# EAGLE board OpenBook_Board (EAGLE 9.7.0)
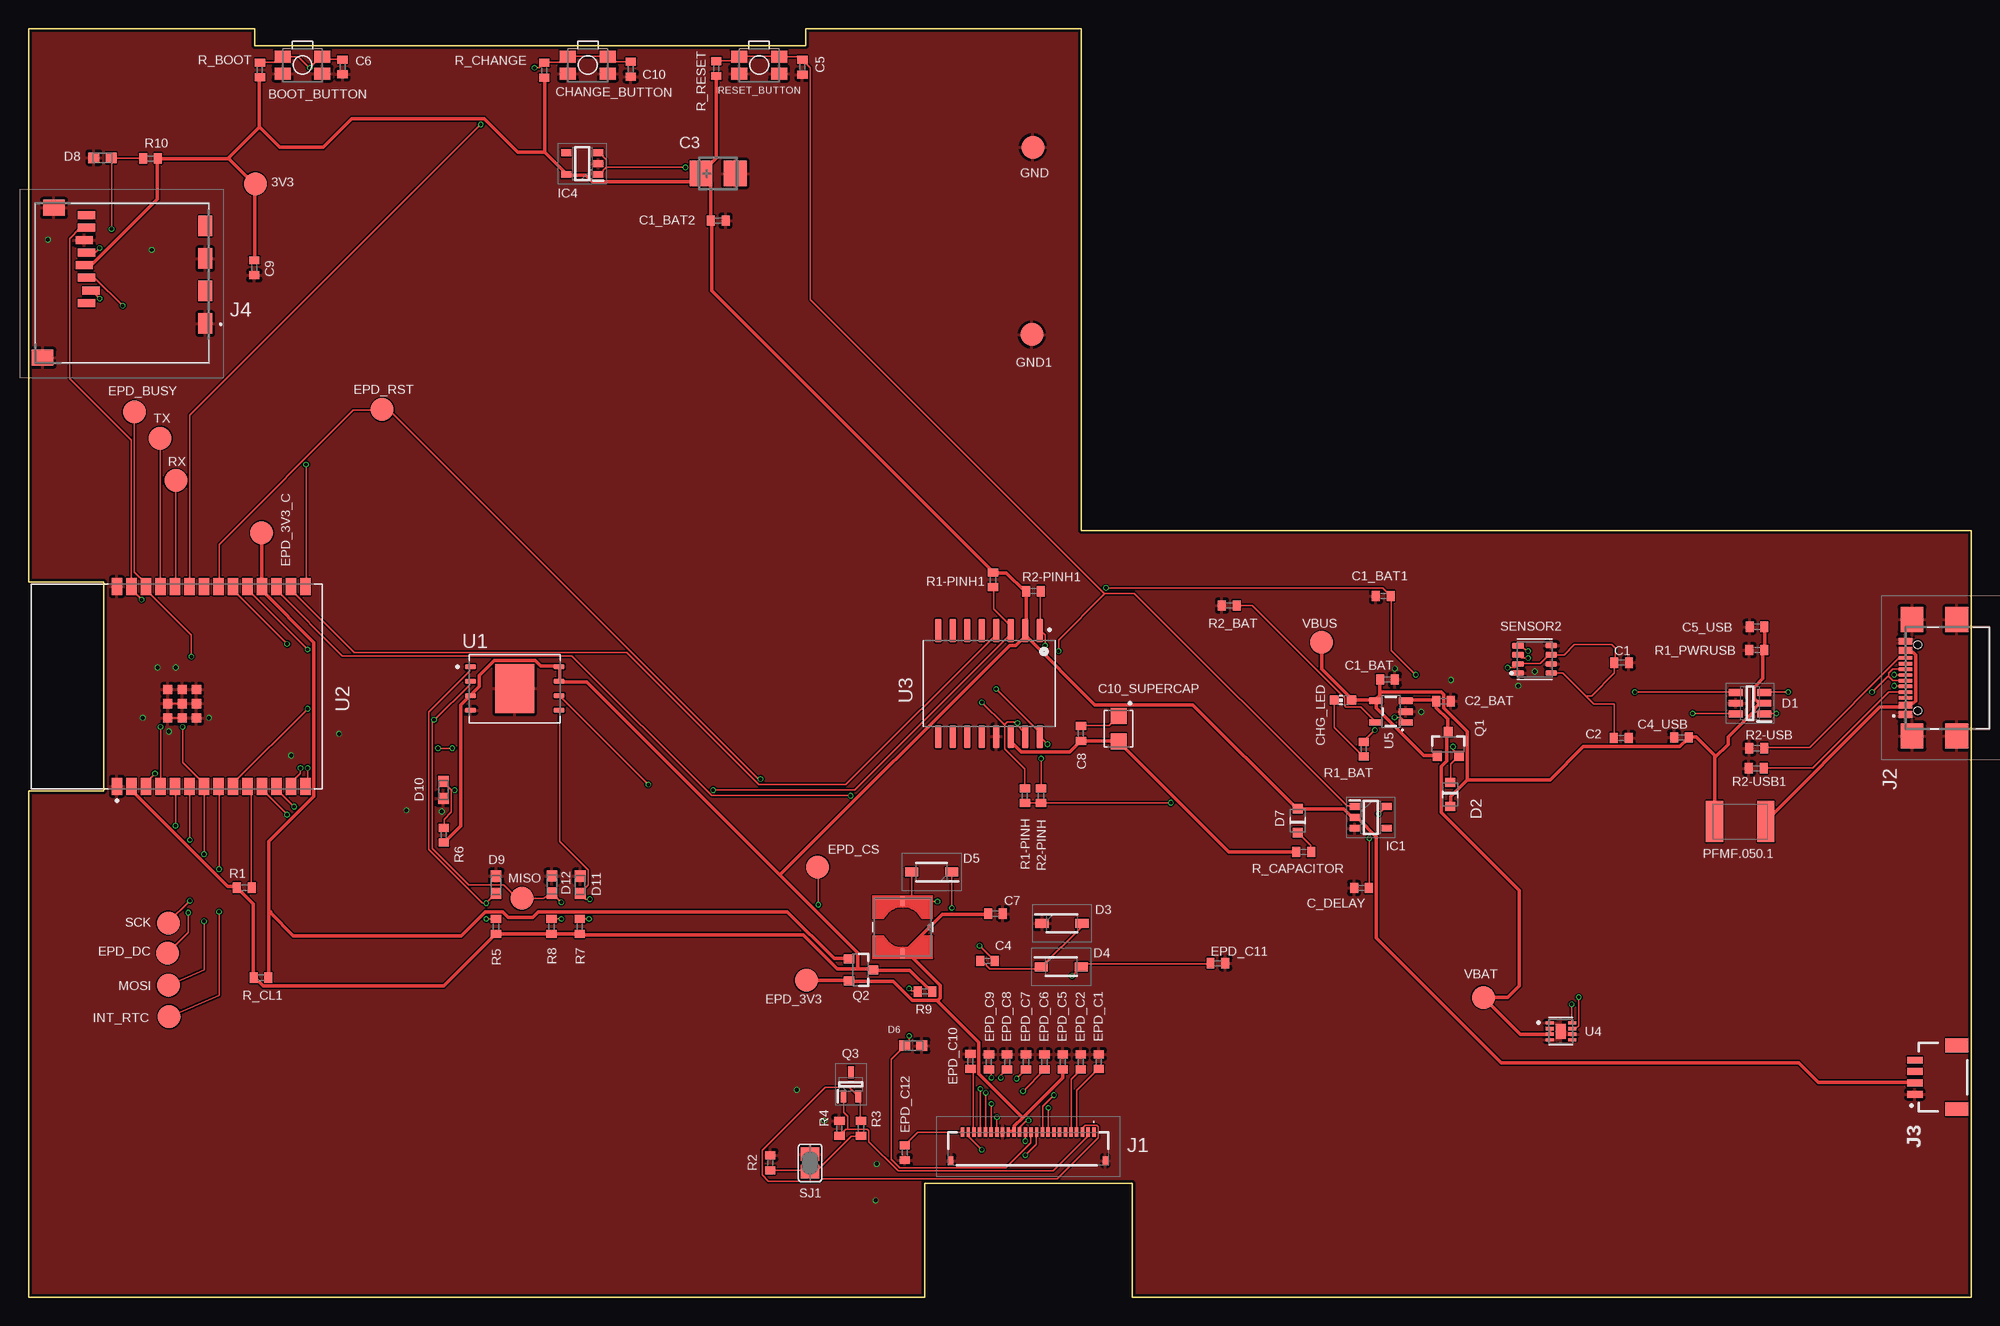
[diagram p0: board, top side]
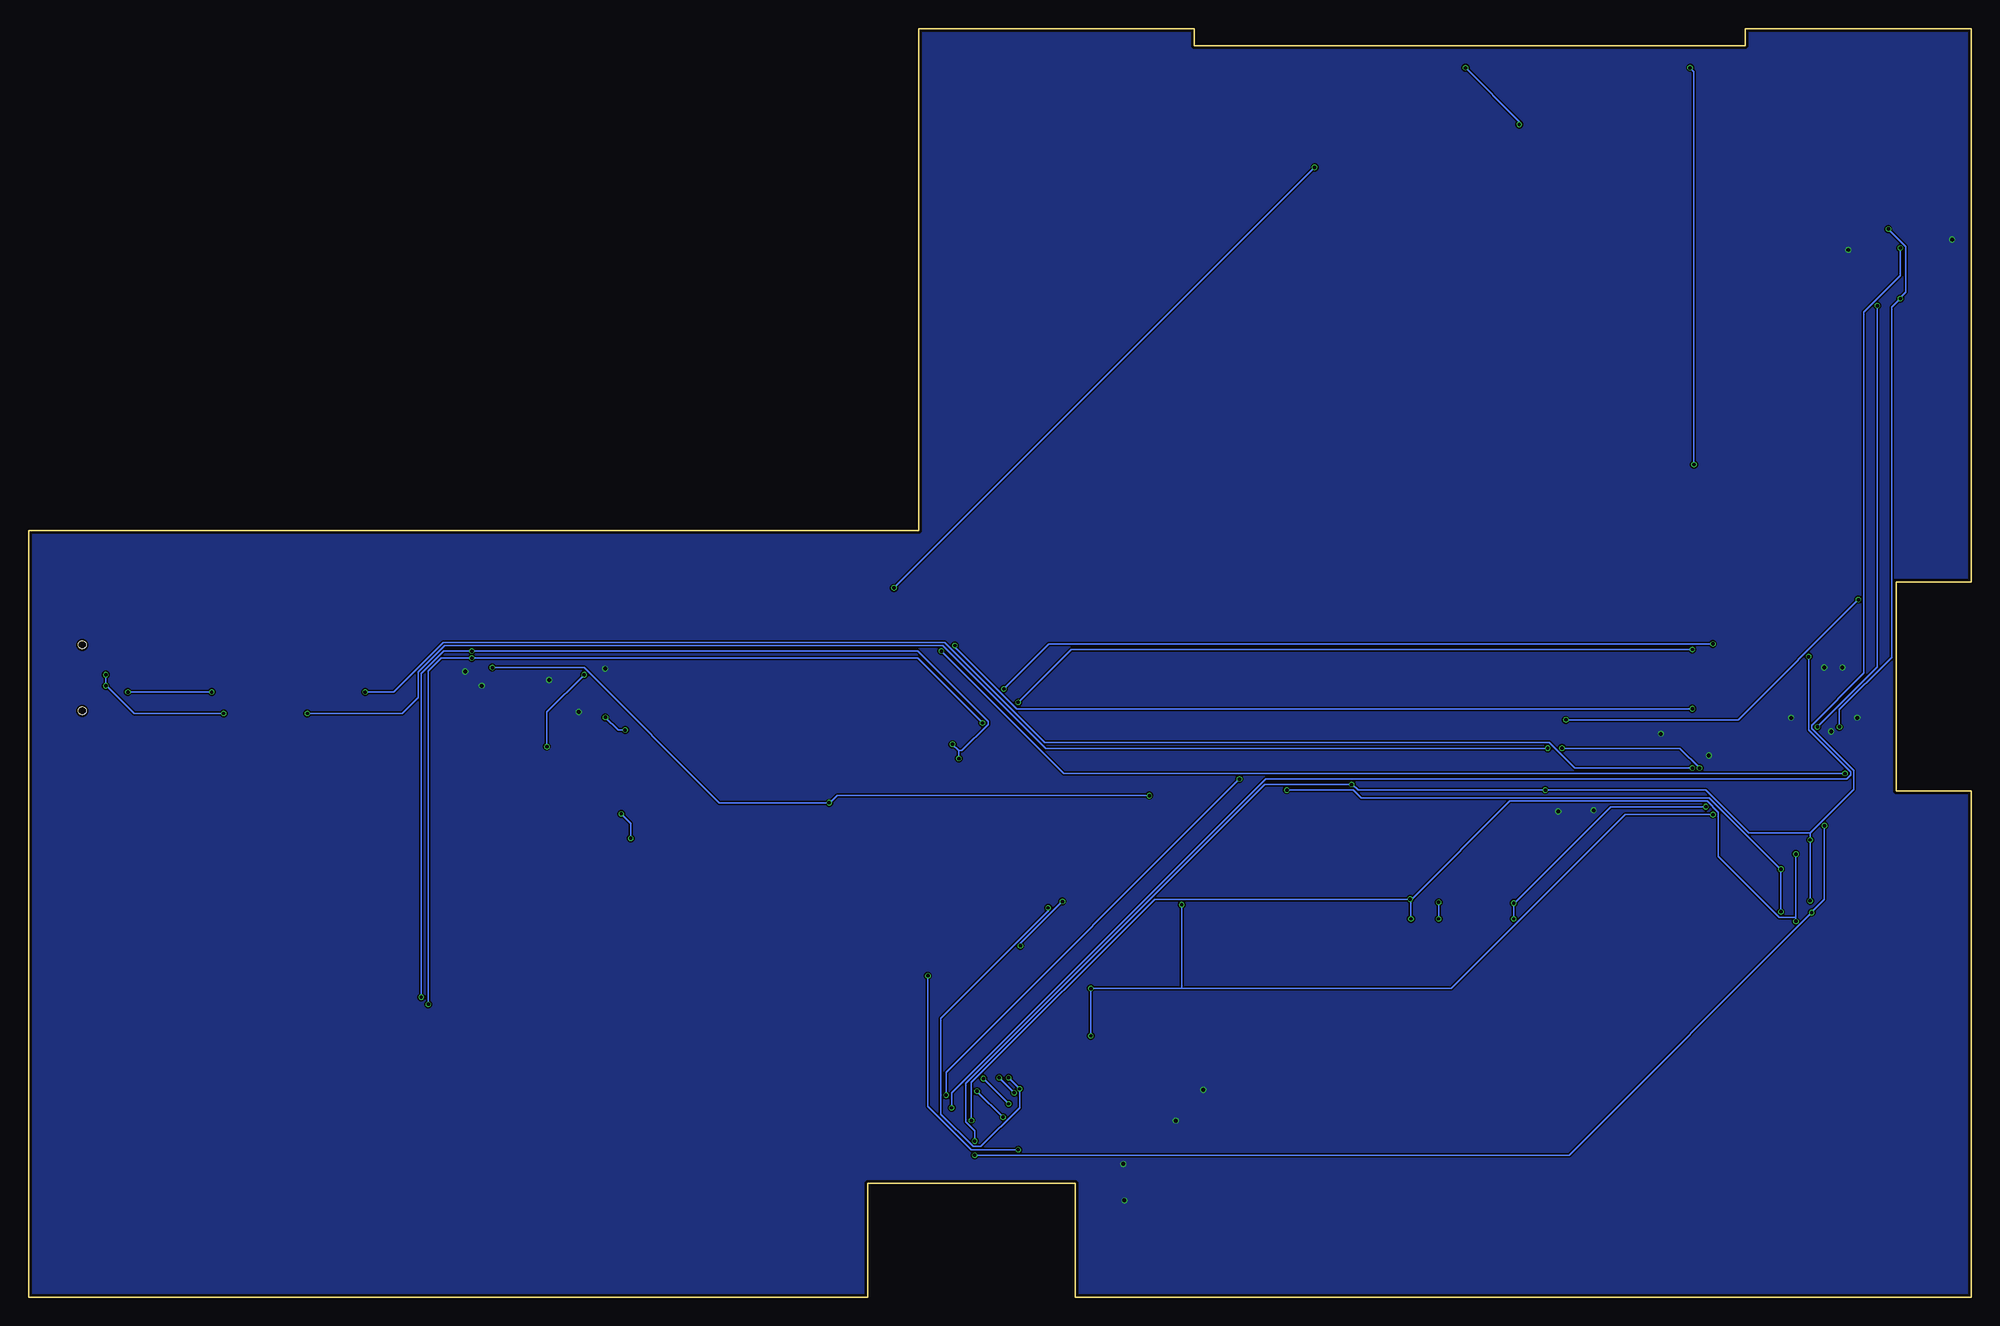
[diagram p1: board, bottom side, seen from below]

Size 170.2 x 111.2 mm. Coordinates in mm from the lower left corner, seen from the top.
Outline: 0,0 78.5,0 78.5,10 96.7,10 96.7,0 170.2,0 170.2,67.2 92.2,67.2 92.2,111.2 68.1,111.2 68.1,109.7 19.8,109.7 19.8,111.2 0,111.2 0,62.7 6.6,62.7 6.6,44.4 0,44.4 0,0
Copper layers (1*16): Top 0.035mm / dielectric 1.6mm / Bottom 0.035mm
Design rules "jlcpcb-2layers.dru *": minimum track width 0.15mm, minimum drill 0.3mm, track to track 5mil, track to pad 5mil, pad to pad 5mil, via to via 5mil, smd to smd 5mil, copper to edge 0.2mm, drill to drill 6mil, minimum pad ring 10mil, minimum via ring 3mil, stop-mask expansion 4mil, vias tented up to drill 0mil, thermal gap 10mil
Net classes: 1 Power: width 0.3 mm

## Footprints (pad centres in the part's own frame; a part is rotated, then mirrored left to right if it is on the bottom)
TP20R = smd 2 x 2: TP 0,0
MYBUTTON = smd 1.4 x 1.05: 1 1.75,0.75; 2 -1.75,0.75; 3 -1.75,-0.75; 4 1.75,-0.75
ESP32_WROVER_EAGLE-LTSPICE_C0402 = smd 0.7 x 0.9: 1 -0.65,0; 2 0.65,0
EAGLE-LTSPICE_C0402 = smd 0.7 x 0.9: 1 -0.65,0; 2 0.65,0
RCL_CT3528 = smd 2 x 2.2: + -1.5,0; - 1.5,0
CAPCP3225X100N = smd 1.4 x 1.4: 1 -1.1,0; 2 1.1,0
ADAFRUIT_CHIP-LED0603 = smd 0.8 x 0.8: A 0,-0.75; C 0,0.75
SOT95P280X145-6N = smd 1.2 x 0.6: 1 -1.25,0.95; 2 -1.25,0; 3 -1.25,-0.95; 4 1.25,-0.95; 5 1.25,0; 6 1.25,0.95
ESP32_WROVER_AVX---SD0805S020S1R0_AVX_SD0805S020S1R0_0 = smd 0.8 x 0.9: 1 -1.05,0; 2 1.05,0
SOD3716X135N = smd 1.15 x 0.8: 1 -1.75,0; 2 1.75,0
DIOC1608X36N = smd 0.97 x 0.94: 1 -0.75,0; 2 0.75,0
SOT95P280X125-5N = smd 0.9 x 0.6: 1 -1.4,0.95; 2 -1.4,0; 3 -1.4,-0.95; 4 1.4,-0.95; 5 1.4,0.95
SOT95P280X120-5N = smd 0.9 x 0.6: 1 -1.4,0.95; 2 -1.4,0; 3 -1.4,-0.95; 4 1.4,-0.95; 5 1.4,0.95
FH34SRJ24S05SH99 = smd 0.3 x 0.8: 1 5.75,1.45; 2 5.25,1.45; 3 4.75,1.45; 4 4.25,1.45; 5 3.75,1.45; 6 3.25,1.45; 7 2.75,1.45; 8 2.25,1.45; 9 1.75,1.45; 10 1.25,1.45; 11 0.75,1.45; 12 0.25,1.45; 13 -0.25,1.45; 14 -0.75,1.45; 15 -1.25,1.45; 16 -1.75,1.45; 17 -2.25,1.45; 18 -2.75,1.45; 19 -3.25,1.45; 20 -3.75,1.45; 21 -4.25,1.45; 22 -4.75,1.45; 23 -5.25,1.45; 24 -5.75,1.45 | smd 0.4 x 0.8: MP1 6.75,-1.05; MP2 -6.75,-1.05
SAMACSYS_PARTS_USB4110GFA = smd 0.3 x 1.15: A1 -3.35,3.678; A4 -2.55,3.678; A5 -1.25,3.678; A6 -0.25,3.678; A7 0.25,3.678; A8 1.25,3.678; A9 2.55,3.678; A12 3.35,3.678; B1 3.05,3.678; B4 2.25,3.678; B5 1.75,3.678; B6 0.75,3.678; B7 -0.75,3.678; B8 -1.75,3.678; B9 -2.25,3.678; B12 -3.05,3.678 | smd 2.18 x 2: MP1 -5.11,-0.827; MP2 5.11,-0.827; MP3 -5.11,3.103; MP4 5.11,3.103 | hole 0.65: -2.89,2.603; 2.89,2.603
JST04_1MM_RA = smd 0.6 x 1.35: 1 -1.5,0; 2 -0.5,0; 3 0.5,0; 4 1.5,0 | smd 1.2 x 2: NC1 2.8,-3.675; NC2 -2.8,-3.675
112ATAARR03ATTEND = smd 1.8 x 1.2: G1 10.6,10.4; G2 4.9,10.4; S1 7.75,10.4; S2 2.05,10.4 | smd 1.4 x 1.9: G3 13.6,-3.85; G4 0.45,-2.85 | smd 0.7 x 1.5: P1 8.8,0; P2 7.7,0.4; P3 6.6,0; P4 5.5,-0.2; P5 4.4,0; P6 3.3,-0.2; P7 2.2,0; P8 1.1,0
IND_4828-WE-TPC_WRE = smd 0.813 x 0.406: 1 -2.286,0; 2 2.286,0
ESP32C6_VARISTOR_CT/CN1812 = smd 1.5 x 3.6: 1 -2.25,0; 2 2.25,0
ESP32_WROVER_SPARKFUN-DISCRETESEMI_SOT23-3 = smd 0.8 x 0.9: 1 -0.95,-1; 2 0.95,-1; 3 0,1.1
SOT65P210X110-3N = smd 1.05 x 0.5: 1 -1.05,0.65; 2 -1.05,-0.65; 3 1.05,0
ESP32_WROVER_EAGLE-LTSPICE_R0402 = smd 0.7 x 0.9: 1 -0.65,0; 2 0.65,0
ESP32_WROVER_BME680_PSON80P300X300X100-8N = smd 1.016 x 0.5: 1 1.458,1.2; 2 1.458,0.4; 3 1.458,-0.4; 4 1.458,-1.2; 5 -1.458,-1.22; 6 -1.458,-0.4; 7 -1.458,0.4; 8 -1.458,1.2
SJ = smd 1.168 x 1.6: 1 -0.762,0; 2 0.762,0
SON127P600X800X80-9N = smd 0.94 x 0.44: 1 -3.895,1.905; 2 -3.895,0.635; 3 -3.895,-0.635; 4 -3.895,-1.905; 5 3.895,-1.905; 6 3.895,-0.635; 7 3.895,0.635; 8 3.895,1.905 | smd 3.4 x 4.3: 9 0,0
XCVR_ESP32-C6-WROOM-1-N8 = smd 1.5 x 0.9: 1 -8.75,5.26; 2 -8.75,3.99; 3 -8.75,2.72; 4 -8.75,1.45; 5 -8.75,0.18; 6 -8.75,-1.09; 7 -8.75,-2.36; 8 -8.75,-3.63; 9 -8.75,-4.9; 10 -8.75,-6.17; 11 -8.75,-7.44; 12 -8.75,-8.71; 13 -8.75,-9.98; 14 -8.75,-11.25; 15 8.75,-11.25; 16 8.75,-9.98; 17 8.75,-8.71; 18 8.75,-7.44; 19 8.75,-6.17; 20 8.75,-4.9; 21 8.75,-3.63; 22 8.75,-2.36; 23 8.75,-1.09; 24 8.75,0.18; 25 8.75,1.45; 26 8.75,2.72; 27 8.75,3.99; 28 8.75,5.26 | smd 0.8 x 0.8: 29_1 -2.755,0.79; 29_2 -1.505,0.79; 29_3 -0.255,0.79; 29_4 -2.755,-0.46; 29_5 -1.505,-0.46; 29_6 -0.255,-0.46; 29_7 -2.755,-1.71; 29_8 -1.505,-1.71; 29_9 -0.255,-1.71
SOIC127P1032X265-16N = smd 2.05 x 0.59: 1 -4.655,4.445; 2 -4.655,3.175; 3 -4.655,1.905; 4 -4.655,0.635; 5 -4.655,-0.635; 6 -4.655,-1.905; 7 -4.655,-3.175; 8 -4.655,-4.445; 9 4.655,-4.445; 10 4.655,-3.175; 11 4.655,-1.905; 12 4.655,-0.635; 13 4.655,0.635; 14 4.655,1.905; 15 4.655,3.175; 16 4.655,4.445
SON50P200X200X80-9N = smd 0.76 x 0.27: 1 -0.985,0.75; 4 -0.985,-0.75; 5 0.985,-0.75; 6 0.985,-0.25; 7 0.985,0.25; 8 0.985,0.75 | smd 0.762 x 0.305: 2 -0.985,0.25; 3 -0.985,-0.25 | smd 0.9 x 1.3: 9 0,0
ESP32_WROVER_SPARKFUN-IC-POWER_SOT23-5 = smd 0.55 x 1.2: 1 -0.95,-1.3; 2 0,-1.3; 3 0.95,-1.3; 4 0.95,1.3; 5 -0.95,1.3

## Placement (x,y rotation side)
3V3  TPTP20R  [TP20R]  19.87,97.59 0 top
BOOT_BUTTON  BUTTON_CUSYOMV1BUTTON  [MYBUTTON]  24,108 180 top
C1  100nF  [ESP32_WROVER_EAGLE-LTSPICE_C0402]  139.55,55.63 0 top
C1_BAT  4.7uF  [EAGLE-LTSPICE_C0402]  119.04,54.15 0 top
C1_BAT1  4.7uF  [EAGLE-LTSPICE_C0402]  118.68,61.47 180 top
C1_BAT2  4.7uF  [EAGLE-LTSPICE_C0402]  60.42,94.37 0 top
C2  100nF  [ESP32_WROVER_EAGLE-LTSPICE_C0402]  139.53,49.03 0 top
C2_BAT  4.7uF  [EAGLE-LTSPICE_C0402]  123.95,52.25 0 top
C3  100uF TANT  [RCL_CT3528]  60.41,98.5 0 top
C4  4.7uF/25V  [EAGLE-LTSPICE_C0402]  84.01,29.49 0 top
C4_USB  100nF  [EAGLE-LTSPICE_C0402]  144.8,49.07 180 top
C5  1uF  [EAGLE-LTSPICE_C0402]  67.79,107.81 270 top
C5_USB  4.7uF  [EAGLE-LTSPICE_C0402]  151.41,58.77 180 top
C6  100nF  [EAGLE-LTSPICE_C0402]  27.51,107.83 270 top
C7  10uF  [EAGLE-LTSPICE_C0402]  84.7,33.63 0 top
C8  100nF  [EAGLE-LTSPICE_C0402]  92.19,49.43 90 top
C9  100nF  [ESP32_WROVER_EAGLE-LTSPICE_C0402]  19.77,90.23 270 top
C10  100nF  [EAGLE-LTSPICE_C0402]  52.75,107.63 270 top
C10_SUPERCAP  CPH3225A  [CAPCP3225X100N]  95.49,49.84 270 top
C_DELAY  100nF  [ESP32_WROVER_EAGLE-LTSPICE_C0402]  116.77,35.89 180 top
CHANGE_BUTTON  BUTTON_CUSYOMV1BUTTON  [MYBUTTON]  49,108 180 top
CHG_LED  [ADAFRUIT_CHIP-LED0603]  115.14,52.35 90 top
D1  USBLC6-2SC6Y  [SOT95P280X145-6N]  150.8,52.07 180 top
D2  ESP32_WROVER_AVX---SD0805S020S1R0_AVX_SD0805S020S1R0_0_0AVX_SD0805S020S1R0_0_0  [ESP32_WROVER_AVX---SD0805S020S1R0_AVX_SD0805S020S1R0_0]  124.54,44.08 270 top
D3  MBR0530  [SOD3716X135N]  90.53,32.78 0 top
D4  MBR0530  [SOD3716X135N]  90.47,28.98 0 top
D5  MBR0530  [SOD3716X135N]  79.11,37.28 180 top
D6  PGB1010603MR  [DIOC1608X36N]  77.5,22.07 180 top
D7  ESP32_WROVER_AVX---SD0805S020S1R0_AVX_SD0805S020S1R0_0_0AVX_SD0805S020S1R0_0_0  [ESP32_WROVER_AVX---SD0805S020S1R0_AVX_SD0805S020S1R0_0]  111.19,41.78 90 top
D8  PGB1010603MR  [DIOC1608X36N]  6.48,99.87 0 top
D9  PGB1010603MR  [DIOC1608X36N]  40.96,36.17 270 top
D10  PGB1010603MR  [DIOC1608X36N]  36.34,44.47 90 top
D11  PGB1010603MR  [DIOC1608X36N]  48.32,36.17 270 top
D12  PGB1010603MR  [DIOC1608X36N]  45.85,36.18 270 top
EPD_3V3  TPTP20R  [TP20R]  68.14,27.79 0 top
EPD_3V3_C  TPTP20R  [TP20R]  20.42,67.01 0 top
EPD_BUSY  TPTP20R  [TP20R]  9.27,77.59 0 top
EPD_C1  1uF/50V  [ESP32_WROVER_EAGLE-LTSPICE_C0402]  93.75,20.67 90 top
EPD_C2  1uF/50V  [ESP32_WROVER_EAGLE-LTSPICE_C0402]  92.18,20.65 90 top
EPD_C5  1uF/50V  [ESP32_WROVER_EAGLE-LTSPICE_C0402]  90.59,20.65 90 top
EPD_C6  1uF/50V  [ESP32_WROVER_EAGLE-LTSPICE_C0402]  89,20.65 90 top
EPD_C7  1uF/50V  [ESP32_WROVER_EAGLE-LTSPICE_C0402]  87.38,20.65 90 top
EPD_C8  1uF/50V  [ESP32_WROVER_EAGLE-LTSPICE_C0402]  85.72,20.65 90 top
EPD_C9  1uF/50V  [ESP32_WROVER_EAGLE-LTSPICE_C0402]  84.13,20.65 90 top
EPD_C10  1uF/50V  [ESP32_WROVER_EAGLE-LTSPICE_C0402]  82.51,20.69 90 top
EPD_C11  1uF/50V  [ESP32_WROVER_EAGLE-LTSPICE_C0402]  104.19,29.29 0 top
EPD_C12  1uF/50V  [ESP32_WROVER_EAGLE-LTSPICE_C0402]  76.75,12.69 270 top
EPD_CS  TPTP20R  [TP20R]  69.12,37.71 0 top
EPD_DC  TPTP20R  [TP20R]  12.19,30.19 0 top
EPD_RST  TPTP20R  [TP20R]  30.97,77.81 0 top
GND  TPTP20R  [TP20R]  87.97,100.79 0 top
GND1  TPTP20R  [TP20R]  87.89,84.39 0 top
IC1  BD5229G-TR  [SOT95P280X125-5N]  117.57,42.07 0 top
IC4  XC6220A331MR-G  [SOT95P280X120-5N]  48.51,99.37 180 top
INT_RTC  TPTP20R  [TP20R]  12.32,24.61 0 top
J1  FH34SRJ-24S-0.5SH_99_  [FH34SRJ24S05SH99]  87.57,13.04 0 top
J2  SAMACSYS_PARTS_USB4110-GF-A  [SAMACSYS_PARTS_USB4110GFA]  168.1,54.3 90 top
J3  QWIIC_RIGHT_ANGLE  [JST04_1MM_RA]  165.25,19.3 90 top
J4  112A-TAAR-R03_ATTEND  [112ATAARR03ATTEND]  5.08,95.95 270 top
L1  68uH  [IND_4828-WE-TPC_WRE]  76.57,32.45 270 top
MISO  TPTP20R  [TP20R]  43.21,34.99 0 top
MOSI  TPTP20R  [TP20R]  12.26,27.36 0 top
PFMF.050.1  ESP32C6_VARISTORCN1812  [ESP32C6_VARISTOR_CT/CN1812]  149.94,41.7 180 top
Q1  20V/4.2A/52mΩ/1.4W  [ESP32_WROVER_SPARKFUN-DISCRETESEMI_SOT23-3]  124.36,48.46 0 top
Q2  20V/4.2A/52mΩ/1.4W  [ESP32_WROVER_SPARKFUN-DISCRETESEMI_SOT23-3]  72.88,28.71 270 top
Q3  SI1308EDL-T1-GE3  [SOT65P210X110-3N]  72.04,18.68 90 top
R1  10K  [ESP32_WROVER_EAGLE-LTSPICE_R0402]  18.91,35.91 0 top
R1-PINH  10K  [ESP32_WROVER_EAGLE-LTSPICE_R0402]  87.28,43.97 270 top
R1-PINH1  10K  [ESP32_WROVER_EAGLE-LTSPICE_R0402]  84.49,62.89 90 top
R1_BAT  200  [ESP32_WROVER_EAGLE-LTSPICE_R0402]  116.96,48.05 270 top
R1_PWRUSB  100K  [ESP32_WROVER_EAGLE-LTSPICE_R0402]  151.4,56.74 180 top
R2  2.2  [ESP32_WROVER_EAGLE-LTSPICE_R0402]  64.97,11.81 270 top
R2-PINH  10K  [ESP32_WROVER_EAGLE-LTSPICE_R0402]  88.69,43.97 270 top
R2-PINH1  10K  [ESP32_WROVER_EAGLE-LTSPICE_R0402]  88.03,61.89 180 top
R2-USB  5k1  [ESP32_WROVER_EAGLE-LTSPICE_R0402]  151.39,48.13 180 top
R2-USB1  5k1  [ESP32_WROVER_EAGLE-LTSPICE_R0402]  151.36,46.37 0 top
R2_BAT  2K  [ESP32_WROVER_EAGLE-LTSPICE_R0402]  105.18,60.63 0 top
R3  0.47  [ESP32_WROVER_EAGLE-LTSPICE_R0402]  72.92,14.83 270 top
R4  10K  [ESP32_WROVER_EAGLE-LTSPICE_R0402]  71.03,14.81 90 top
R5  10K  [ESP32_WROVER_EAGLE-LTSPICE_R0402]  40.95,32.51 270 top
R6  10K  [ESP32_WROVER_EAGLE-LTSPICE_R0402]  36.37,40.51 270 top
R7  10K  [ESP32_WROVER_EAGLE-LTSPICE_R0402]  48.29,32.51 270 top
R8  10K  [ESP32_WROVER_EAGLE-LTSPICE_R0402]  45.81,32.51 270 top
R9  10K  [ESP32_WROVER_EAGLE-LTSPICE_R0402]  78.53,26.81 0 top
R10  10K  [ESP32_WROVER_EAGLE-LTSPICE_R0402]  10.69,99.81 0 top
R_BOOT  10K  [ESP32_WROVER_EAGLE-LTSPICE_R0402]  20.27,107.57 90 top
R_CAPACITOR  15  [ESP32_WROVER_EAGLE-LTSPICE_R0402]  111.7,39.04 0 top
R_CHANGE  10K  [ESP32_WROVER_EAGLE-LTSPICE_R0402]  45.17,107.54 90 top
R_CL1  10K  [ESP32_WROVER_EAGLE-LTSPICE_R0402]  20.37,28.03 0 top
R_RESET  10K  [ESP32_WROVER_EAGLE-LTSPICE_R0402]  60.25,107.69 90 top
RESET_BUTTON  BUTTON_CUSYOMV1BUTTON  [MYBUTTON]  64,108 180 top
RX  TPTP20R  [TP20R]  12.91,71.59 0 top
SCK  TPTP20R  [TP20R]  12.25,32.82 0 top
SENSOR2  ESP32_WROVER_BME680_BME680  [ESP32_WROVER_BME680_PSON80P300X300X100-8N]  131.94,55.92 180 top
SJ1  [SJ]  68.46,11.79 270 top
TX  TPTP20R  [TP20R]  11.53,75.29 0 top
U1  W25Q512JVEIQ  [SON127P600X800X80-9N]  42.59,53.36 0 top
U2  ESP32-C6-WROOM-1-N8  [XCVR_ESP32-C6-WROOM-1-N8]  13,53.54 90 top
U3  DS3231SN#  [SOIC127P1032X265-16N]  84.15,53.8 270 top
U4  MAX17048G+T10  [SON50P200X200X80-9N]  134.23,23.32 0 top
U5  ESP32_WROVER_SPARKFUN-IC-POWER_MCP73831  [ESP32_WROVER_SPARKFUN-IC-POWER_SOT23-5]  119.34,51.34 90 top
VBAT  TPTP20R  [TP20R]  127.45,26.29 0 top
VBUS  TPTP20R  [TP20R]  113.27,57.41 0 top

## Library data of the parts
3V3 BOOT_BUTTON CHANGE_BUTTON CHG_LED EPD_3V3 EPD_3V3_C EPD_BUSY EPD_CS EPD_DC EPD_RST GND GND1 INT_RTC MISO MOSI PFMF.050.1 RESET_BUTTON RX SCK SJ1 TX VBAT VBUS = DeskAssistant v19 v1
C1 C1_BAT C1_BAT1 C1_BAT2 C2 C2_BAT C4 C4_USB C5 C5_USB C6-C10 C_DELAY EPD_C1 EPD_C2 EPD_C5-EPD_C12 = DeskAssistant v19 v1; SPICEMODEL: NONE; SPICEPREFIX: C
C3 = DeskAssistant v19 v1; SPICEPREFIX: C
C10_SUPERCAP = DeskAssistant v19 v1; AVAILABILITY: Not in stock; CHECK_PRICES: https://www.snapeda.com/parts/CPH3225A/Seiko+Instruments/view-part/?ref=eda; DESCRIPTION: 11 mF (EDLC) Supercapacitor 3.3 V 1210 (3225 Metric) - -; MF: Seiko Instruments; MP: CPH3225A; PACKAGE: 1210 Seiko; PRICE: None; PURCHASE-URL: https://www.snapeda.com/api/url_track_click_mouser/?unipart_id=562593&manufacturer=Seiko Instruments&part_name=CPH3225A&search_term=None; SNAPEDA_LINK: https://www.snapeda.com/parts/CPH3225A/Seiko+Instruments/view-part/?ref=snap
D1 = DeskAssistant v19 v1; AVAILABILITY: In Stock; CHECK_PRICES: https://www.snapeda.com/parts/USBLC6-2SC6Y/STMicroelectronics/view-part/?ref=eda; DESCRIPTION: 17V Clamp 5A (8/20µs) Ipp Tvs Diode Surface Mount SOT-23-6; MF: STMicroelectronics; MP: USBLC6-2SC6Y; PACKAGE: SOT-23-6 STMicroelectronics; PRICE: None; SNAPEDA_LINK: https://www.snapeda.com/parts/USBLC6-2SC6Y/STMicroelectronics/view-part/?ref=snap
D2 D7 = DeskAssistant v19 v1; CENTROID_NOT_SPECIFIED: No; DATASHEET: http://datasheets.avx.com/schottky.pdf; DIGIKEY_DESCRIPTION: DIODE SCHOTTKY 20V 1A 0805; DIGIKEY_PART_NUMBER: 478-7800-1-ND; LEAD_FREE: yes; MF: AVX; MOUSER_PART_NUMBER: 581-SD0805S020S1R0; PACKAGE: 0805 (2012 metric); PREFIX: D; ROHS: yes; TEMPERATURE_RANGE_HIGH: +125°C; TEMPERATURE_RANGE_LOW: -55°C
D3-D5 = DeskAssistant v19 v1; AVAILABILITY: In Stock; CHECK_PRICES: https://www.snapeda.com/parts/MBR0530/Onsemi/view-part/?ref=eda; DESCRIPTION: Diode Schottky 30 V 500mA Surface Mount SOD-123; MF: ON Semiconductor; MP: MBR0530; PACKAGE: SOD-123-2 ON Semiconductor; PRICE: None; PURCHASE-URL: https://www.snapeda.com/api/url_track_click_mouser/?unipart_id=179458&manufacturer=ON Semiconductor&part_name=MBR0530&search_term=None; SNAPEDA_LINK: https://www.snapeda.com/parts/MBR0530/Onsemi/view-part/?ref=snap
D6 D8-D12 = DeskAssistant v19 v1; AVAILABILITY: In Stock; CHECK_PRICES: https://www.snapeda.com/parts/PGB1010603MR/Littelfuse/view-part/?ref=eda; DESCRIPTION: 150V (Typ) Clamp - Ipp Tvs Diode Surface Mount 0603 (1608 Metric); MF: Littelfuse Inc.; MP: PGB1010603MR; PACKAGE: 0603 Littelfuse Inc.; PRICE: None; PURCHASE-URL: https://www.snapeda.com/api/url_track_click_mouser/?unipart_id=5659453&manufacturer=Littelfuse Inc.&part_name=PGB1010603MR&search_term=None; SNAPEDA_LINK: https://www.snapeda.com/parts/PGB1010603MR/Littelfuse/view-part/?ref=snap
IC1 = DeskAssistant v19 v1; DESCRIPTION: Voltage Detector with Adjustable Delay Time: CMOS processes are utilized to develop high precision, low current consumption CMOS reset ICs that allow arbitrary setting of the delay time. The extensive lineup includes both Nch Open Drain and CMOS output types in a wide range of detection voltages (from 2.3V to 6.0V, in 0.1V steps), enabling selection of the ideal solution based on customer requirements. In addition, the entire series is of course both lead-free and RoHS-compliant.; HEIGHT: 1.25mm; MANUFACTURER_NAME: ROHM Semiconductor; MANUFACTURER_PART_NUMBER: BD5229G-TR; MOUSER_PART_NUMBER: 755-BD5229G-TR; MOUSER_PRICE-STOCK: https://www.mouser.co.uk/ProductDetail/ROHM-Semiconductor/BD5229G-TR?qs=4kLU8WoGk0vvnhrrYwdszw%3D%3D
IC4 = DeskAssistant v19 v1; DESCRIPTION: LDO Voltage Regulators; HEIGHT: 1.2mm; MANUFACTURER_NAME: Torex; MANUFACTURER_PART_NUMBER: XC6220A331MR-G; MOUSER_PART_NUMBER: 865-XC6220A331MR-G; MOUSER_PRICE-STOCK: https://www.mouser.co.uk/ProductDetail/Torex-Semiconductor/XC6220A331MR-G?qs=AsjdqWjXhJ8ZSWznL1J0gg%3D%3D
J1 = DeskAssistant v19 v1; DESCRIPTION: 24 Position FFC, FPC Connector Contacts, Top and Bottom 0.020" (0.50mm) Surface Mount, Right Angle; HEIGHT: 1.1mm; MANUFACTURER_NAME: Hirose; MANUFACTURER_PART_NUMBER: FH34SRJ-24S-0.5SH(99); MOUSER_PART_NUMBER: 798-FH34SRJ24S05SH99; MOUSER_PRICE-STOCK: https://www.mouser.co.uk/ProductDetail/Hirose-Connector/FH34SRJ-24S-0.5SH99?qs=vcbW%252B4%252BSTIpKBl5ap9J8Fw%3D%3D
J2 = DeskAssistant v19 v1; DESCRIPTION: CONN USB 2.0 TYPE-C R/A SMT; HEIGHT: 3.26mm; MANUFACTURER_NAME: GCT (GLOBAL CONNECTOR TECHNOLOGY); MANUFACTURER_PART_NUMBER: USB4110-GF-A; MOUSER_PART_NUMBER: 640-USB4110-GF-A; MOUSER_PRICE-STOCK: https://www.mouser.co.uk/ProductDetail/GCT/USB4110-GF-A?qs=KUoIvG%2F9IlYiZvIXQjyJeA%3D%3D
J3 = DeskAssistant v19 v1; PROD_ID: CONN-13694
J4 = DeskAssistant v19 v1; DESCRIPTION: Micro SD Card Socket, Push-Push Type, Top Mount, SMT, H=1.83mm, 10u; HEIGHT: 1.9mm; MANUFACTURER_NAME: ATTEND; MANUFACTURER_PART_NUMBER: 112A-TAAR-R03 ATTEND
L1 = DeskAssistant v19 v1; COPYRIGHT: Copyright (C) 2024 Ultra Librarian. All rights reserved.; MANUFACTURER_PART_NUMBER: 744043680; MFR_NAME: Wurth Electronics
Q1 Q2 = DeskAssistant v19 v1; PROD_ID: TRAN-14388
Q3 = DeskAssistant v19 v1; AVAILABILITY: In Stock; CHECK_PRICES: https://www.snapeda.com/parts/SI1308EDL-T1-GE3/Vishay+Siliconix/view-part/?ref=eda; DESCRIPTION: Si1308EDL-T1-GE3 N-channel MOSFET Transistor, 1.5 A, 30 V, 3-Pin SC-70 | Siliconix / Vishay SI1308EDL-T1-GE3; MF: Vishay Siliconix; MP: SI1308EDL-T1-GE3; PACKAGE: SOT-323 Vishay Semiconductor; PRICE: None; PURCHASE-URL: https://www.snapeda.com/api/url_track_click_mouser/?unipart_id=274603&manufacturer=Vishay Siliconix&part_name=SI1308EDL-T1-GE3&search_term=None; SNAPEDA_LINK: https://www.snapeda.com/parts/SI1308EDL-T1-GE3/Vishay+Siliconix/view-part/?ref=snap
R1 R1-PINH R1-PINH1 R1_BAT R1_PWRUSB R2 R2-PINH R2-PINH1 R2-USB R2-USB1 R2_BAT R3-R10 R_BOOT R_CAPACITOR R_CHANGE R_CL1 R_RESET = DeskAssistant v19 v1; SPICEMODEL: NONE; SPICEPREFIX: R
SENSOR2 = DeskAssistant v19 v1; AVAILABILITY: Unavailable; DESCRIPTION: Integrated Environmental Unit; MF: Bosch Sensortec; MP: BME680; PACKAGE: LGA-8 Bosch Tools; PRICE: None
U1 = DeskAssistant v19 v1; AVAILABILITY: In Stock; CHECK_PRICES: https://www.snapeda.com/parts/W25Q512JVEIQ/Winbond+Electronics/view-part/?ref=eda; DESCRIPTION: FLASH - NOR Memory IC 512Mb (64M x 8) SPI - Quad I/O 133 MHz 8-WSON (8x6); MF: Winbond Electronics; MP: W25Q512JVEIQ; PACKAGE: Package; PRICE: None; SNAPEDA_LINK: https://www.snapeda.com/parts/W25Q512JVEIQ/Winbond+Electronics/view-part/?ref=snap
U2 = DeskAssistant v19 v1; AVAILABILITY: In Stock; CHECK_PRICES: https://www.snapeda.com/parts/ESP32-C6-WROOM-1-N8/Espressif+Systems/view-part/?ref=eda; DESCRIPTION: Multiprotocol Modules ESP32-C6 module, Wi-Fi 6 in 2.4 GHz band, Bluetooth 5, Zigbee 3.0 and Thread. ESP34-WROOM Compatible - ENGINEERING SAMPLE; MF: Espressif Systems; MP: ESP32-C6-WROOM-1-N8; PACKAGE: None; PRICE: None; SNAPEDA_LINK: https://www.snapeda.com/parts/ESP32-C6-WROOM-1-N8/Espressif+Systems/view-part/?ref=snap
U3 = DeskAssistant v19 v1; AVAILABILITY: In Stock; CHECK_PRICES: https://www.snapeda.com/parts/DS3231SN%23/Analog+Devices/view-part/?ref=eda; DESCRIPTION: Extremely Accurate I²C-Integrated RTC/TCXO/Crystal; MF: Analog Devices; MP: DS3231SN#; PACKAGE: SOIC-16 Maxim; PRICE: None; PURCHASE-URL: https://www.snapeda.com/api/url_track_click_mouser/?unipart_id=99048&manufacturer=Analog Devices&part_name=DS3231SN#&search_term=None; SNAPEDA_LINK: https://www.snapeda.com/parts/DS3231SN%23/Analog+Devices/view-part/?ref=snap
U4 = DeskAssistant v19 v1; AVAILABILITY: In Stock; CHECK_PRICES: https://www.snapeda.com/parts/MAX17048G+T10/Analog+Devices/view-part/?ref=eda; DESCRIPTION: 3µA 1-Cell/2-Cell Fuel Gauge with ModelGauge; MF: Analog Devices; MP: MAX17048G+T10; PACKAGE: TDFN-8 Maxim; PRICE: None; PURCHASE-URL: https://www.snapeda.com/api/url_track_click_mouser/?unipart_id=329239&manufacturer=Analog Devices&part_name=MAX17048G+T10&search_term=None; SNAPEDA_LINK: https://www.snapeda.com/parts/MAX17048G+T10/Analog+Devices/view-part/?ref=snap
U5 = DeskAssistant v19 v1; PROD_ID: IC-09995

## Nets
3V3 [Power]: 3V3.TP C1_BAT2.1 C3.+ C9.1 D7.2 IC1.2 IC4.5 J3.2 J4.P4 Q2.3 R1-PINH1.2 R1.1 R2-PINH1.2 R5.2 R6.2 R7.2 R8.2 R9.2 R10.2 R_BOOT.1 R_CHANGE.1 R_CL1.1 R_RESET.1 U1.3 U1.7 U1.8 U2.2 U3.2
32KHZ: R2-PINH1.1 U2.9 U3.1
DN: D1.1 J2.A7 J2.B7
DP: D1.3 J2.A6 J2.B6
EPD_3V3 [Power]: C7.1 EPD_3V3.TP EPD_C5.1 J1.15 J1.16 L1.2 Q2.2
EPD_3V3_C [Power]: EPD_3V3_C.TP Q2.1 R_CL1.2 U2.18
EPD_BUSY: EPD_BUSY.TP J1.9 U2.26
EPD_CS: D6.2 EPD_CS.TP J1.12 R9.1 U2.11
EPD_DC: EPD_DC.TP J1.11 U2.5
EPD_RST: EPD_RST.TP J1.10 U2.21
FLASH_CS: D9.2 R5.1 U1.1 U2.12
GDR: J1.2 Q3.1 R4.1
GND: BOOT_BUTTON.1 BOOT_BUTTON.2 C1.2 C1_BAT1.2 C1_BAT2.2 C1_BAT.2 C2.2 C2_BAT.2 C3.- C4_USB.2 C5.2 C5_USB.2 C6.2 C7.2 C9.2 C10.2 C_DELAY.2 CHANGE_BUTTON.1 CHANGE_BUTTON.2 D1.5 D3.1 D6.1 D8.1 D9.1 D10.1 D11.1 D12.1 EPD_C1.2 EPD_C2.2 EPD_C5.2 EPD_C6.2 EPD_C7.2 EPD_C8.2 EPD_C9.2 EPD_C10.2 EPD_C11.2 EPD_C12.2 GND1.TP GND.TP IC1.3 IC4.2 J1.17 J1.MP1 J1.MP2 J2.A1 J2.A12 J2.B1 J2.B12 J2.MP1 J2.MP2 J2.MP3 J2.MP4 J3.1 J4.G1 J4.G2 J4.G3 J4.G4 J4.P6 R1_PWRUSB.2 R2-USB1.1 R2-USB.2 R2.1 R2_BAT.1 R4.2 RESET_BUTTON.1 RESET_BUTTON.2 SENSOR2.1 SENSOR2.5 SENSOR2.7 SJ1.1 U1.4 U1.9 U2.1 U2.28 U2.29_1 U2.29_2 U2.29_3 U2.29_4 U2.29_5 U2.29_6 U2.29_7 U2.29_8 U2.29_9 U3.13 U4.1 U4.4 U4.6 U4.9 U5.2
GPIO8: R1.2 U2.10
I2C_PW: C1.1 C2.1 R1-PINH.2 R2-PINH.2 SENSOR2.2 SENSOR2.6 SENSOR2.8 U2.17
INT_RTC: INT_RTC.TP R1-PINH1.1 U2.8 U3.3
IO/BOOT: BOOT_BUTTON.3 BOOT_BUTTON.4 C6.1 R_BOOT.2 U2.15
IO/CHANGE: C10.1 CHANGE_BUTTON.3 CHANGE_BUTTON.4 R_CHANGE.2 U2.23
MISO: D12.2 J4.P7 MISO.TP R8.1 U1.2 U2.27
MOSI: D11.2 J1.14 J4.P3 MOSI.TP R7.1 U1.5 U2.7
N$1: D7.1 R_CAPACITOR.2
N$2: EPD_C2.1 J1.5
N$3: C8.2 C10_SUPERCAP.1
N$4: EPD_C1.1 J1.4
N$5: EPD_C6.1 J1.18
N$6: EPD_C7.1 J1.19
N$7: C_DELAY.1 IC1.5
N$8: C4.2 D5.2 L1.1
N$9: EPD_C8.1 J1.20
N$10: C4.1 D3.2 D4.1
N$11: EPD_C10.1 J1.22
N$13: EPD_C12.1 J1.24
N$14: CHG_LED.C R1_BAT.2
N$15: R1_BAT.1 U5.1
N$16: R2_BAT.2 U5.5
N$19: C1_BAT1.1 D2.1 IC4.1 IC4.3 Q1.2
N$20: J2.A5 R2-USB1.2
N$28: J2.B5 R2-USB.1
PREVGH: D5.1 EPD_C9.1 J1.21
PREVGL: D4.2 EPD_C11.1 J1.23
RESE: J1.3 Q3.2 R3.1
RESE': R2.2 R3.2 SJ1.2
RESET: C5.1 IC1.1 R_RESET.2 RESET_BUTTON.3 RESET_BUTTON.4 U2.3
RTC_RST: U2.16 U3.4
RX: RX.TP U2.24
SCA: J3.3
SCD: J3.4
SCK: D10.2 J1.13 J4.P5 R6.1 SCK.TP U1.6 U2.6
SCL: R2-PINH.1 SENSOR2.4 U2.20 U3.16 U4.7
SDA: R1-PINH.1 SENSOR2.3 U2.19 U3.15 U4.8
SRC: Q3.3
SS_SD: D8.2 J4.P2 R10.1 U2.4
TX: TX.TP U2.25
USB_D+: D1.4 U2.14
USB_D-: D1.6 U2.13
VBAT [Power]: C2_BAT.1 Q1.3 U4.2 U4.3 U5.3 VBAT.TP
VBUS [Power]: C1_BAT.1 C4_USB.1 C5_USB.1 CHG_LED.A D1.2 D2.2 PFMF.050.1.2 Q1.1 R1_PWRUSB.1 U5.4 VBUS.TP
VRTC [Power]: C8.1 C10_SUPERCAP.2 R_CAPACITOR.1 U3.14
VUSB [Power]: J2.A4 J2.A9 J2.B4 J2.B9 PFMF.050.1.1

## Tracks (layer width: path | path; a pad name or v marks a point on that pad's centre or on a via)
3V3
  Top 0.3: U2.2 9.07,44.74 9.07,44.39 17.45,36.01 18.14,36.01 R1.1 18.28,35.87 19.67,34.49 19.67,28.05 R_CL1.1 19.8,27.91 19.94,27.91 20.55,27.3 36.38,27.3 40.86,31.79 R5.2 41,31.86 45.77,31.86 R8.2 45.91,31.86 48.27,31.86 R7.2 48.41,31.79 67.86,31.79 70.84,28.81 72.64,28.81 | R6.2 36.42,39.89 37.88,41.34 37.88,51.94 38.64,52.7 U1.3 38.78,52.84 39.47,53.53 39.47,54.5 40.79,55.82 44.39,55.82 44.87,55.33 46.4,55.33 U1.8 46.54,55.26 46.54,54.02 U1.7 46.67,53.95 48.89,53.95 65.82,37.01 | R9.2 79.15,26.87 79.01,26.87 77.21,28.67 74.03,28.67 Q2.3 73.89,28.81 72.64,28.81 | 65.82,37.01 72.64,30.19 72.64,28.81 | 45.22,100.34 45.22,106.85 R_CHANGE.1 | 45.22,100.34 47.09,98.47 IC4.5 47.23,98.33 48.82,98.33 49.38,97.78 58.17,97.78 58.79,98.4 C3.+ | C3.+ 58.93,98.47 59.76,97.64 59.76,94.39 C1_BAT2.1 59.83,94.25 59.83,88.22 84.42,63.64 R1-PINH1.2 84.55,63.5 85.66,63.5 87.25,61.91 R2-PINH1.2 87.39,61.84 87.39,58.52 U3.2 | R_RESET.1 60.25,106.99 60.25,99.86 59,98.61 C3.+ | C9.1 19.8,90.92 19.8,97.57 3V3.TP 19.67,97.64 17.52,99.79 | 17.52,99.79 11.36,99.79 R10.2 11.29,99.65 11.29,96.26 5.54,90.51 4.92,90.51 J4.P4 | 20.22,102.6 20.22,102.56 17.59,99.93 17.52,99.79 | 20.22,102.6 20.22,106.85 R_BOOT.1 | J3.2 165.23,18.84 156.78,18.84 155.05,20.57 129.01,20.57 118.07,31.51 118.07,40.37 116.48,41.97 116.27,41.97 IC1.2 116.13,42.1 115.92,42.1 115.23,42.8 111.22,42.8 D7.2 111.08,42.87 102,51.94 93.42,51.94 87.32,58.03 87.32,58.31 U3.2 | 65.82,37.01 85.94,57.13 86.49,57.13 87.25,57.89 U3.2 | 20.22,102.6 22.02,100.8 25.8,100.8 28.3,103.3 39.9,103.3 42.85,100.34 45.22,100.34
32KHZ  (via drill 0.3)
  Top 0.15: R2-PINH1.1 88.64,61.84 88.64,58.52 U3.1 88.64,58.45 89.06,58.03 v89.06,57.13 | v24.45,51.59 17.94,45.08 17.94,44.8 U2.9
  Bottom 0.15: v24.45,51.59 83.65,51.59 89.06,56.99 v89.06,57.13
DN  (via drill 0.3)
  Top 0.15: v163.43,53.6 164.4,53.6 J2.B7 | v163.43,54.57 164.4,54.57 J2.A7 | v153.11,51.18 152.07,51.18 D1.1
  Bottom 0.15: v163.43,54.57 v163.43,53.6 163.36,53.6 160.94,51.18 v153.11,51.18
DP  (via drill 0.3)
  Top 0.15: 162.94,54.43 163.29,54.08 164.4,54.08 J2.A6 | 162.94,54.43 162.94,54.71 163.29,55.05 164.4,55.05 J2.B6 | v154.15,53.05 152.07,53.05 D1.3 | v161.49,53.05 162.88,54.43 162.94,54.43
  Bottom 0.15: v161.49,53.05 v154.15,53.05
EPD_3V3
  Top 0.3: J1.16 85.87,14.54 86.28,14.54 J1.15 86.36,14.68 86.36,15.03 87.08,15.75 | 87.08,15.75 90.58,19.25 90.58,19.94 EPD_C5.1 | EPD_3V3.TP 70.18,27.79 71.81,27.77 Q2.2 72.02,27.7 75.76,27.7 77.42,26.04 79.64,26.04 | 76.83,30.37 76.59,30.12 L1.2 | 76.83,30.37 80.05,33.59 84,33.59 C7.1 | 79.64,26.04 79.84,26.25 79.84,27.35 76.83,30.37 | 87.08,15.75 83.24,19.6 83.24,22.37 79.71,25.9 79.64,26.04
EPD_3V3_C
  Top 0.3: 21.05,33.79 21.05,39.96 25,43.9 25,57.41 20.5,61.91 20.5,62.26 U2.18 20.43,62.39 20.43,66.97 EPD_3V3_C.TP | 21.05,33.79 21.05,28.05 R_CL1.2 | 21.05,33.79 21.2,33.79 21.2,33.7 23.2,31.7 37.91,31.7 40,33.79 40.99,33.79 41,33.79 41.55,33.79 42.04,33.3 44.17,33.3 44.67,33.79 66.48,33.79 70.57,29.71 71.81,29.71 Q2.1
EPD_BUSY  (via drill 0.3)
  Top 0.15: v89.33,16.62 89.33,14.54 J1.9 | v14.27,56.16 14.27,58.03 10.32,61.98 10.32,62.26 U2.26 10.25,62.33 10.25,62.6 9.28,63.57 9.28,77.52 EPD_BUSY.TP
  Bottom 0.15: v89.33,16.62 89.33,17.94 61.84,45.43 10.94,45.43 10.6,45.77 10.6,46.05 14.27,49.72 v14.27,56.16
EPD_CS  (via drill 0.3)
  Top 0.15: J1.12 87.81,14.47 87.81,13.57 85.59,11.36 76.31,11.36 75.55,12.12 75.55,20.84 76.73,22.02 D6.2 76.8,22.09 77.14,22.44 v77.14,22.92 | v77.14,27.08 77.35,26.87 77.84,26.87 R9.1 | v22.64,42.31 20.5,44.46 20.5,44.74 U2.11 | v69.18,34.42 69.18,37.67 EPD_CS.TP
  Bottom 0.15: v77.14,22.92 v77.14,27.08 69.18,27.08 | v22.64,42.31 30.33,42.31 45.57,27.08 69.18,27.08 | 69.18,27.08 v69.18,34.42
EPD_DC  (via drill 0.3)
  Top 0.15: v87.32,12.46 88.29,13.43 88.29,14.47 J1.11 | v12.88,41.34 12.88,44.74 U2.5 | v13.99,33.73 13.99,31.98 EPD_DC.TP
  Bottom 0.15: v87.32,12.46 35.25,12.46 v13.99,33.73 13.99,33.79 12.88,34.9 v12.88,41.34
EPD_RST  (via drill 0.3)
  Top 0.15: v89.82,17.73 88.85,16.76 88.85,14.54 J1.10 | v64.13,45.43 63.92,45.43 31.58,77.77 31.02,77.77 EPD_RST.TP 30.95,77.77 28.46,77.77 16.69,66 16.69,62.33 U2.21
  Bottom 0.15: v89.82,17.73 89.82,19.74 v64.13,45.43
FLASH_CS  (via drill 0.3)
  Top 0.15: v40.1,33.17 40.93,33.17 R5.1 | D9.2 v40.1,34.56 39.75,34.56 35.04,39.27 35.04,51.31 38.64,54.91 38.64,55.26 U1.1 | v23.27,43 21.74,44.53 21.74,44.74 U2.12
  Bottom 0.15: v40.1,33.17 v40.1,34.56 40.03,34.56 31.58,43 v23.27,43
GDR
  Top 0.15: 71.74,14.75 71.61,14.75 71.05,14.2 R4.1 | 71.74,14.75 73.47,14.75 73.61,14.61 73.61,13.64 76.17,11.08 89.75,11.08 92.8,14.13 92.8,14.47 J1.2 | 71.74,14.75 71.74,15.86 71.4,16.2 71.4,17.59 Q3.1
GND  (via drill 0.35)
  Top 0.152: U2.29_2 U2.29_5 | U2.29_1 U2.29_4
  other vias: 15.8,50.8 36.2,42.6 33.1,42.7 23,47.5 27.2,49.4 1.7,92.7 10.8,91.8 11.3,55.2 12.9,55.2 10,50.8 12.3,49.6 74.3,11.7 74.2,8.5 67.3,18.2 69.7,15.5 122,51.3 124.6,54.1 119.7,55.1 130.5,53.6 131.95,54.85
  pour Top: 78.46,10.06 78.48,10.08 96.72,10.08 96.74,10.06 96.76,10.04 96.78,10.02 96.78,0.08 170.12,0.08 170.12,67.12 92.18,67.12 92.16,67.14 92.14,67.16 92.12,67.18 92.12,111.12 68.18,111.12 68.18,109.78 68.16,109.76 68.04,109.64 68.02,109.62 19.78,109.62 19.76,109.64 19.74,109.66 19.72,109.68 19.72,111.12 0.08,111.12 0.08,62.78 6.62,62.78 6.64,62.76 6.66,62.74 6.68,62.72 6.68,44.38 6.66,44.36 6.64,44.34 6.62,44.32 0.08,44.32 0.08,0.08 78.42,0.08 78.42,10.02 78.44,10.04
  pour Bottom: 78.46,10.06 78.48,10.08 96.72,10.08 96.74,10.06 96.76,10.04 96.78,10.02 96.78,0.08 170.12,0.08 170.12,67.12 92.18,67.12 92.16,67.14 92.14,67.16 92.12,67.18 92.12,111.12 68.18,111.12 68.18,109.68 68.16,109.66 68.14,109.64 68.12,109.62 19.78,109.62 19.76,109.64 19.74,109.66 19.72,109.68 19.72,111.12 0.08,111.12 0.08,62.78 6.62,62.78 6.64,62.76 6.66,62.74 6.68,62.72 6.68,44.38 6.66,44.36 6.64,44.34 6.62,44.32 0.08,44.32 0.08,0.08 78.42,0.08 78.42,10.02 78.44,10.04
GPIO8
  Top 0.15: R1.2 19.53,35.94 19.53,44.39 19.18,44.74 U2.10
I2C_PW  (via drill 0.3)
  Top 0.15: C2.1 138.92,49.1 138.92,52 137.12,52 136.41,52.71 | C1.1 138.92,55.61 138.92,54.71 136.92,52.71 136.41,52.71 | SENSOR2.8 133.44,54.71 134.41,54.71 136.41,52.71 | R1-PINH.2 87.32,43.35 88.64,43.35 R2-PINH.2 88.71,43.35 v100.07,43.35 | v129.57,55.19 130.19,55.19 130.47,55.47 SENSOR2.2 130.54,55.54 132.41,55.54 133.17,56.3 133.38,56.3 SENSOR2.6 133.1,56.3 | v72.02,43.97 59.83,43.97 47.58,56.23 27.49,56.23 21.74,61.98 21.74,62.26 U2.17
  Top 0.152: SENSOR2.6 134.52,56.32 135.4,57.2 138.7,57.2 139,56.9 139,56.5 139,55.73 C1.1
  Bottom 0.15: v129.57,55.19 121.53,55.19 109.69,43.35 v100.07,43.35 100,43.35 99.37,43.97 v72.02,43.97
INT_RTC  (via drill 0.3)
  Top 0.15: R1-PINH1.1 84.55,62.19 84.55,60.32 86.01,58.86 86.01,58.52 U3.3 86.01,58.45 86.01,58.1 72.37,44.46 v59.97,44.46 | v16.69,37.53 16.69,44.74 U2.8 | v16.69,33.79 16.69,26.49 INT_RTC.TP
  Bottom 0.15: v16.69,33.79 v16.69,37.53 16.76,37.53 22.99,43.77 53.46,43.77 54.15,44.46 v59.97,44.46
IO/BOOT  (via drill 0.3)
  Top 0.15: R_BOOT.2 20.29,108.24 21.74,108.24 22.23,108.72 BOOT_BUTTON.4 22.3,108.72 23.61,108.72 24.58,107.75 v24.65,107.75 25.69,108.79 BOOT_BUTTON.3 25.76,108.72 25.97,108.52 27.49,108.52 C6.1 | v24.31,72.99 24.31,62.33 U2.15
  Bottom 0.15: v24.31,72.99 24.31,107.41 v24.65,107.75
IO/CHANGE  (via drill 0.3)
  Top 0.15: C10.1 52.7,108.31 51.18,108.31 50.76,108.72 CHANGE_BUTTON.3 50.69,108.79 47.3,108.79 CHANGE_BUTTON.4 47.23,108.72 46.74,108.24 45.22,108.24 R_CHANGE.2 45.15,108.17 44.74,107.75 v44.32,107.75 | U2.23 14.13,62.33 14.13,77.31 v39.61,102.8
  Bottom 0.15: v44.32,107.75 39.61,103.04 v39.61,102.8
MISO  (via drill 0.3)
  Top 0.15: v46.67,33.17 45.84,33.17 R8.1 | v46.67,34.62 45.91,35.39 D12.2 45.84,35.39 45.09,34.99 MISO.TP 42.41,35.35 41.62,36.15 38.57,36.15 35.39,39.33 35.39,50.41 35.56,50.59 | 35.56,50.59 38.64,53.67 38.64,53.95 U1.2 | J4.P7 5.05,93.69 4.5,93.69 3.6,92.8 3.6,80.54 9,75.14 9,62.33 U2.27 9.07,62.26 9.07,61.98 v9.9,61.15 | v35.52,50.62 35.56,50.59
  Bottom 0.15: v46.67,34.62 v46.67,33.17 | v35.52,50.62 20.43,50.62 v9.9,61.15
MOSI  (via drill 0.3)
  Top 0.15: v15.37,38.85 15.37,44.74 U2.7 15.3,44.8 15.3,45.08 13.5,46.88 v13.5,50 | v15.37,32.96 15.37,28.72 MOSI.TP | v8.24,86.91 5.82,89.33 5.12,89.33 J4.P3 | v87.6,15.51 87.46,15.51 86.84,14.89 86.84,14.54 J1.14 | v49.17,34.9 48.82,34.9 48.34,35.39 D11.2 48.34,35.46 49.03,36.15 49.03,37.46 46.54,39.96 46.54,51.45 U1.5 | v49.1,33.17 48.34,33.17 R7.1
  Bottom 0.15: v15.37,32.96 15.37,33.31 | 15.37,33.31 v15.37,38.85 | v8.24,86.91 8.24,55.26 v13.5,50 | v87.6,15.51 87.6,18.84 71.53,34.9 v49.17,34.9 | v49.1,33.17 49.1,34.9 v49.17,34.9 | 15.37,33.31 16.83,33.31 22.16,38.64 22.16,42.52 23.13,43.49 40.44,43.49 49.03,34.9 v49.17,34.9
N$1
  Top 0.15: R_CAPACITOR.2 112.32,39.06 112.32,39.61 111.22,40.72 D7.1
N$2
  Top 0.15: J1.5 91.34,14.54 91.34,19.11 92.17,19.94 EPD_C2.1
N$3
  Top 0.15: C8.2 92.24,50.14 94.67,50.14 95.43,50.9 C10_SUPERCAP.1
N$4
  Top 0.15: J1.4 91.83,14.54 91.83,18.14 93.69,20.01 EPD_C1.1
N$5  (via drill 0.3)
  Top 0.15: v84.83,15.79 84.83,14.54 J1.18 | v87.12,18.07 88.99,19.94 EPD_C6.1
  Bottom 0.15: v87.12,18.07 v84.83,15.79
N$6  (via drill 0.3)
  Top 0.15: v84.35,16.97 84.35,14.54 J1.19 | v86.56,19.18 87.32,19.94 EPD_C7.1
  Bottom 0.15: v86.56,19.18 v84.35,16.97
N$7  (via drill 0.3)
  Top 0.15: v117.45,40.23 117.45,35.94 C_DELAY.1 | v118.28,42.38 118.9,43 IC1.5
  Bottom 0.15: v117.45,40.23 117.45,41.55 v118.28,42.38
N$8  (via drill 0.3)
  Top 0.15: v83.31,30.82 84.62,29.5 C4.2 | 77.35,34.69 76.59,34.69 L1.1 | 77.35,34.69 v79.63,34.69 | 77.35,34.69 77.35,37.26 D5.2
  Bottom 0.15: v83.31,30.82 83.31,31.02 v79.63,34.69
N$9  (via drill 0.3)
  Top 0.15: v83.86,17.94 83.86,14.54 J1.20 | v85.18,19.25 85.18,19.46 85.66,19.94 EPD_C8.1
  Bottom 0.15: v85.18,19.25 v83.86,17.94
N$10
  Top 0.15: C4.1 83.38,29.43 83.58,29.43 84.21,28.81 88.57,28.81 88.71,28.95 D4.1 88.78,29.02 92.24,32.48 92.24,32.76 D3.2
N$11
  Top 0.15: J1.22 82.75,14.54 82.75,19.8 82.55,20.01 EPD_C10.1
N$13
  Top 0.15: J1.24 81.78,14.47 77.91,14.47 76.8,13.37 EPD_C12.1
N$14
  Top 0.15: CHG_LED.C 114.4,52.28 114.4,49.93 116.89,47.44 R1_BAT.2
N$15  (via drill 0.3)
  Top 0.15: v117.93,49.72 116.96,48.75 R1_BAT.1 | v119.66,50.83 120.22,50.83 120.63,50.41 U5.1
  Bottom 0.15: v117.93,49.72 118.56,49.72 v119.66,50.83
N$16
  Top 0.15: U5.5 116.68,51.75 115.41,51.75 115.29,51.87 115.29,52.54 107.2,60.63 R2_BAT.2
N$19  (via drill 0.3)
  Top 0.15: 50.62,99.03 50.07,98.47 49.93,98.47 IC4.1 | 50.62,99.03 50.62,99.72 50.07,100.27 49.93,100.27 IC4.3 | D2.1 124.58,45.15 124.58,46.74 125.27,47.44 Q1.2 125.27,47.51 124.79,47.99 v124.79,48.27 | v121.53,54.57 119.39,56.72 119.39,61.42 C1_BAT1.1 119.32,61.49 118.62,62.19 v94.39,62.19 | v57.55,99.03 50.62,99.03
  Bottom 0.15: v121.53,54.57 124.79,51.31 v124.79,48.27 | v94.39,62.19 v57.55,99.03
N$20
  Top 0.15: R2-USB1.2 152.07,46.4 156.3,46.4 162.94,53.05 164.4,53.05 J2.A5
N$28
  Top 0.15: R2-USB.1 152.07,48.2 156.02,48.2 163.84,56.02 164.4,56.02 J2.B5
PREVGH  (via drill 0.3)
  Top 0.15: v83.38,18.28 83.38,14.54 J1.21 | v84.35,19.25 84.35,19.74 84.14,19.94 EPD_C9.1 | v80.88,34.14 80.88,37.26 D5.1
  Bottom 0.15: v84.35,19.25 v83.38,18.28 83.38,16.62 86.77,13.23 87.46,13.23 90.3,16.07 90.3,24.45 80.88,33.86 v80.88,34.14
PREVGL  (via drill 0.3)
  Top 0.15: v83.52,12.95 82.34,14.13 82.34,14.47 J1.23 | v91.41,28.18 92.17,28.95 D4.2 92.24,29.02 92.45,29.22 103.53,29.22 EPD_C11.1
  Bottom 0.15: v83.52,12.95 87.6,12.95 91.41,16.76 v91.41,28.18
RESE
  Top 0.15: J1.3 92.38,14.54 92.38,14.89 92.59,15.1 93.56,15.1 93.69,14.96 93.69,13.99 90.09,10.39 69.53,10.39 69.32,10.18 64.82,10.18 64.26,10.73 64.26,12.88 69.8,18.42 71.88,18.42 72.64,17.66 Q3.2 72.71,17.59 72.85,17.45 72.85,15.51 R3.1
RESE'
  Top 0.15: R2.2 65.03,11.15 68.35,11.15 68.42,11.08 SJ1.2 68.49,11.08 69.04,11.08 72.09,14.13 72.85,14.13 R3.2
RESET  (via drill 0.3)
  Top 0.15: R_RESET.2 60.32,108.38 61.84,108.38 62.19,108.72 RESET_BUTTON.4 62.26,108.79 65.72,108.79 RESET_BUTTON.3 65.79,108.72 67.52,108.72 67.73,108.52 C5.1 67.8,108.44 68.49,107.75 68.49,87.46 94.25,61.7 | 94.25,61.7 96.88,61.7 115.51,43.07 116.13,43.07 IC1.1 | v11.08,45.91 10.32,45.15 10.32,44.8 U2.3 | v90.23,56.65 90.23,57.62 94.25,61.63 94.25,61.7
  Bottom 0.15: v11.08,45.91 79.5,45.91 v90.23,56.65
RTC_RST
  Top 0.15: U2.16 22.99,62.26 22.99,62.05 28.53,56.51 52.42,56.51 63.99,44.94 71.61,44.94 84.76,58.1 84.76,58.45 U3.4
RX
  Top 0.15: U2.24 12.88,62.33 12.88,71.53 RX.TP
SCK  (via drill 0.3)
  Top 0.15: v14.13,40.1 14.13,44.74 U2.6 | v6.23,91.96 5.89,91.62 5.12,91.62 J4.P5 | 37.05,44.46 37.05,42.53 36.42,41.91 36.42,41.2 R6.1 | 37.05,44.46 36.36,45.15 D10.2 | v87.32,13.71 87.32,14.47 J1.13 | v54.29,44.94 46.54,52.7 U1.6 | v37.33,44.46 37.05,44.46 | v14.13,34.76 14.12,34.76 12.25,32.9 SCK.TP
  Bottom 0.15: v14.13,34.76 v14.13,40.1 14.13,40.72 | v6.23,91.96 6.23,89.54 9.42,86.36 9.42,54.71 13.99,50.14 13.99,49.86 10.32,46.19 10.32,44.53 14.13,40.72 | v87.32,13.71 87.32,14.61 88.09,15.37 88.09,18.77 61.91,44.94 v54.29,44.94 54.22,44.94 53.74,44.46 v37.33,44.46 23.27,44.46 19.53,40.72 14.13,40.72
SCL  (via drill 0.3)
  Top 0.15: v135.8,26.32 135.8,23.82 135.59,23.61 135.25,23.61 U4.7 | v131.37,56.65 131.23,56.65 130.81,57.06 130.54,57.06 SENSOR2.4 | v88.71,47.23 88.71,44.67 R2-PINH.1 | v89.26,48.48 88.64,49.1 U3.16 88.57,49.17 88.57,49.51 v84.76,53.32 | v22.64,57.27 17.94,61.98 17.94,62.26 U2.20
  Bottom 0.15: 88.71,47.92 v88.71,47.23 | v89.26,48.48 88.71,47.92 | v22.64,57.27 80.81,57.27 v84.76,53.32 | 88.71,47.92 88.43,47.92 86.15,50.21 86.15,50.48 92.31,56.65 v131.37,56.65 133.84,56.65 135.8,54.68 v135.8,26.32
SDA  (via drill 0.3)
  Top 0.15: v135.18,25.69 135.18,24.1 U4.8 | v131.37,56.02 130.81,56.02 130.54,56.3 SENSOR2.3 | 85.52,50.21 85.52,48.06 87.25,46.33 87.25,44.67 R1-PINH.1 | 85.52,50.21 85.73,50.41 86.36,50.41 86.53,50.24 | 86.53,50.24 87.32,49.44 87.32,49.17 U3.15 | v24.45,56.78 19.18,62.05 19.18,62.26 U2.19 | v83.52,52.15 85.45,50.21 85.52,50.21 | 86.53,50.24 v86.63,50.34
  Bottom 0.15: v135.18,25.69 135.18,54.91 134.07,56.02 v131.37,56.02 92.31,56.02 v86.63,50.34 | v24.45,56.78 78.88,56.78 v83.52,52.15
SS_SD  (via drill 0.3)
  Top 0.15: R10.1 9.97,99.86 7.27,99.86 D8.2 7.27,99.79 v7.27,93.63 | v11.56,50 11.56,44.8 U2.4 | v6.23,87.53 5.54,88.22 J4.P2
  Bottom 0.15: v11.56,50 11.56,51.52 6.99,56.09 6.99,86.77 v6.23,87.53 6.23,87.6 5.75,88.09 5.75,92.1 v7.27,93.63
TX
  Top 0.15: U2.25 11.53,62.3 TX.TP
USB_D+  (via drill 0.3)
  Top 0.15: v140.72,53.05 149.51,53.05 D1.4 | v24.45,46.4 24.45,44.94 24.31,44.8 U2.14
  Bottom 0.15: v24.45,46.4 34.76,46.4 36.98,48.61 81.16,48.61 89.96,57.41 133.86,57.41 138.22,53.05 v140.72,53.05
USB_D-  (via drill 0.3)
  Top 0.15: v145.77,51.18 149.51,51.18 D1.6 | v35.87,48.13 v37.12,48.13 | v23.82,46.4 23.82,45.91 22.99,45.08 22.99,44.8 U2.13
  Bottom 0.15: v145.77,51.18 137.46,51.18 136.08,52.56 136.08,54.8 133.74,57.13 90.09,57.13 81.09,48.13 v37.12,48.13 | v35.87,48.13 25.55,48.13 v23.82,46.4
VBAT
  Top 0.3: U4.2 133.24,23.55 133.24,23.13 U4.3 133.1,23.06 130.68,23.06 130.67,23.07 VBAT.TP 129.6,26.29 130.6,27.29 130.61,27.3 130.61,35.66 123.75,42.52 123.75,46.54 124.23,47.02 124.23,49.44 Q1.3 124.3,49.58 124.3,50.69 123.33,51.66 123.33,52.22 C2_BAT.1 123.2,52.35 120.7,52.35 U5.3
VBUS
  Top 0.3: C5_USB.1 152.07,58.72 152.07,56.78 R1_PWRUSB.1 151.94,56.65 151.94,54.22 151.17,53.46 151.17,52.49 151.52,52.15 D1.2 152,52.01 151.59,52.01 151.17,51.59 151.17,51.38 148.89,49.1 148.89,48.48 147.71,47.3 | 147.71,47.3 147.71,41.76 PFMF.050.1.2 | U5.4 118,52.35 115.92,52.35 CHG_LED.A 115.86,52.49 113.29,55.05 113.29,57.41 VBUS.TP | Q1.1 123.4,47.51 122.23,47.51 118.07,51.66 118.07,52.15 U5.4 | 118.35,53.05 118.35,52.77 118.07,52.49 U5.4 | 118.35,53.05 118.35,54.08 C1_BAT.1 | 126.03,45.36 124.58,43.9 124.58,43.07 D2.2 | 126.03,45.36 126.03,49.58 123.96,51.66 123.96,52.84 123.75,53.05 118.35,53.05 | 126.03,45.36 133.29,45.36 136.2,48.27 144.66,48.27 145.36,48.96 C4_USB.1 145.49,49.1 146.1,49.1 147.71,47.49 147.71,47.3
VRTC
  Top 0.3: R_CAPACITOR.1 111.01,39.06 105.12,39.06 95.56,48.61 C10_SUPERCAP.2 95.43,48.75 92.24,48.75 C8.1 92.1,48.68 91.2,47.78 86.98,47.78 86.08,48.68 86.08,49.1 U3.14
VUSB
  Top 0.3: J2.A9 164.4,56.78 164.4,56.58 J2.B4 164.54,56.51 165.09,56.51 165.3,56.3 165.3,52.28 165.09,52.08 164.54,52.08 J2.B9 164.4,52.01 164.4,51.8 J2.A4 164.26,51.73 162.18,51.73 152.21,41.76 PFMF.050.1.1